# Altium PCB MAGI'sUSBMeter.PcbDoc
Units mil, origin at the board's own origin, x right, y up, seen from the top; angles counter-clockwise.
Board outline 6000 x 4000 mil, 2 copper layers (Top Layer, Bottom Layer); 16 components, 10 nets, 75 pads, 24 vias.
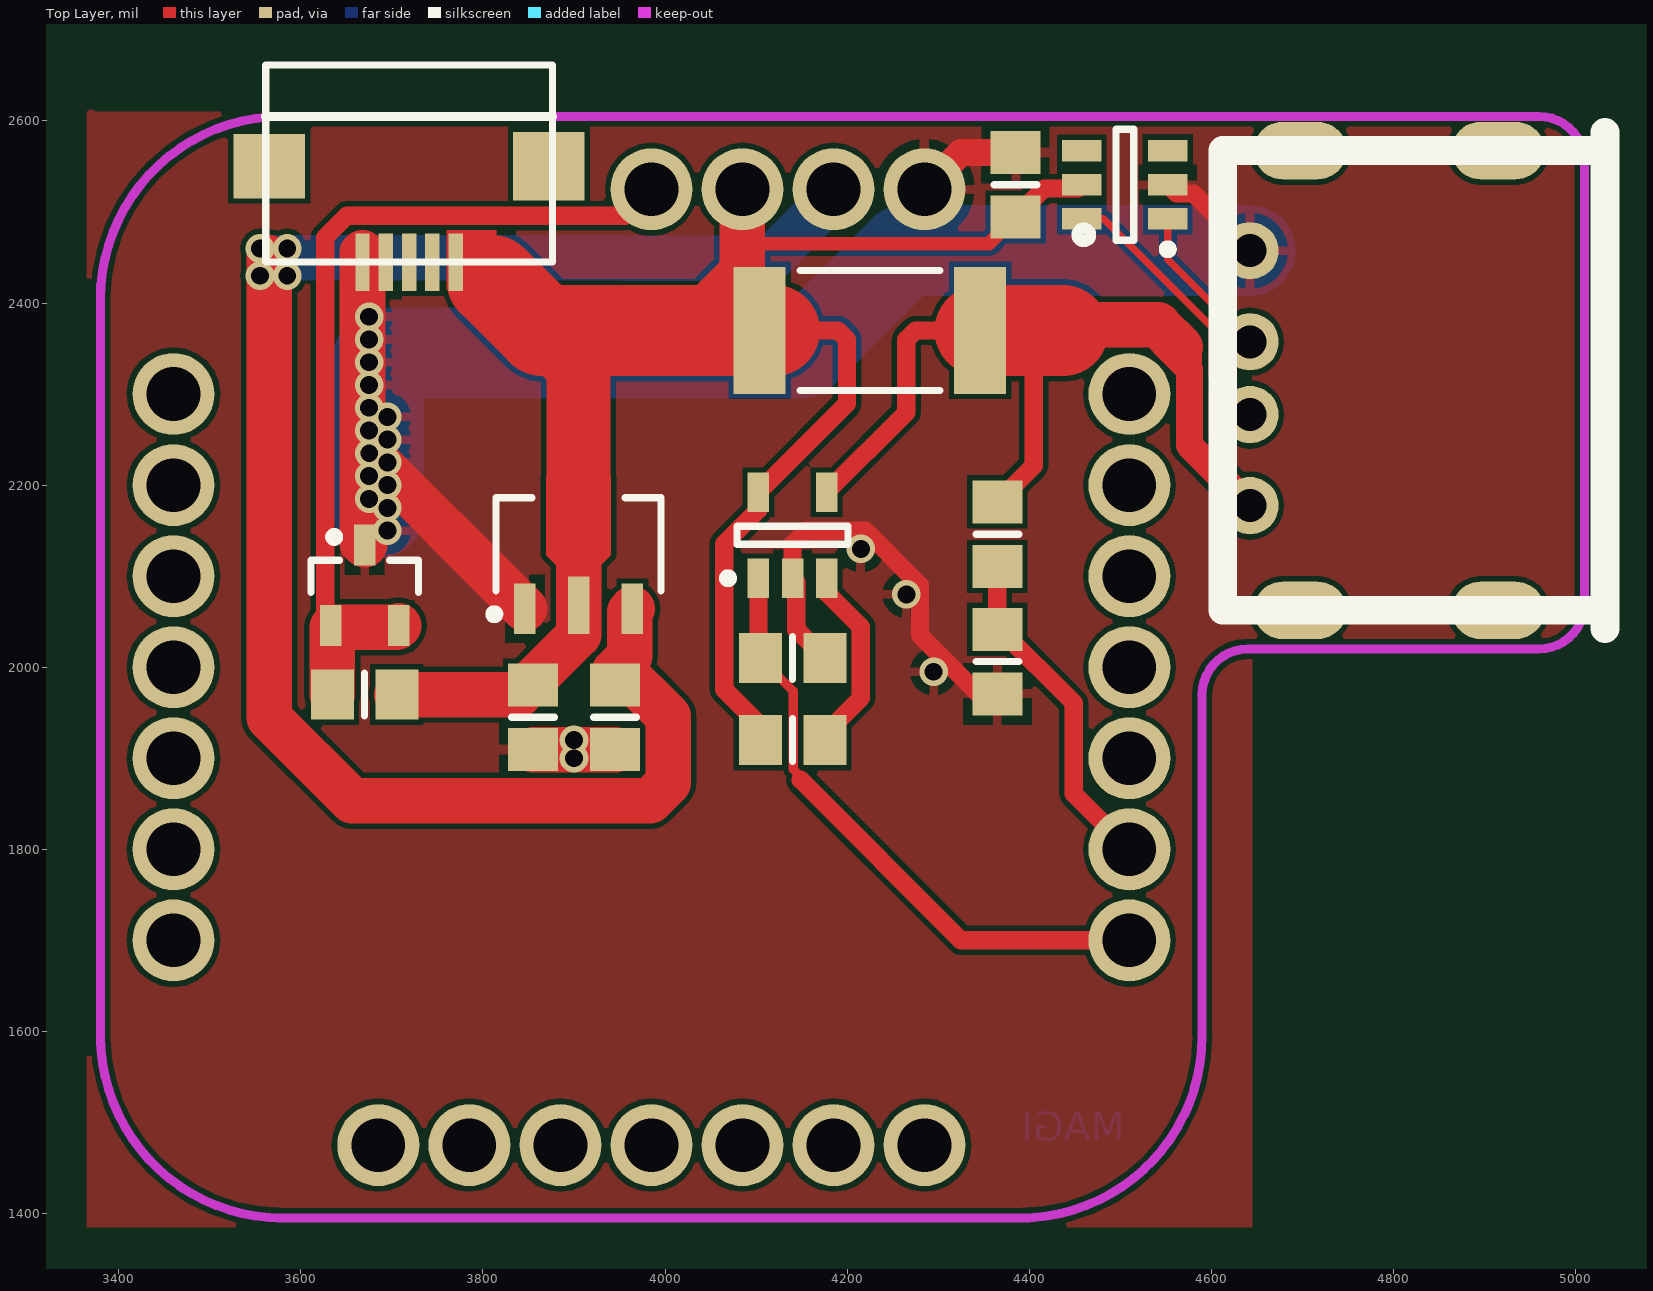
[diagram p0: Top Layer view]
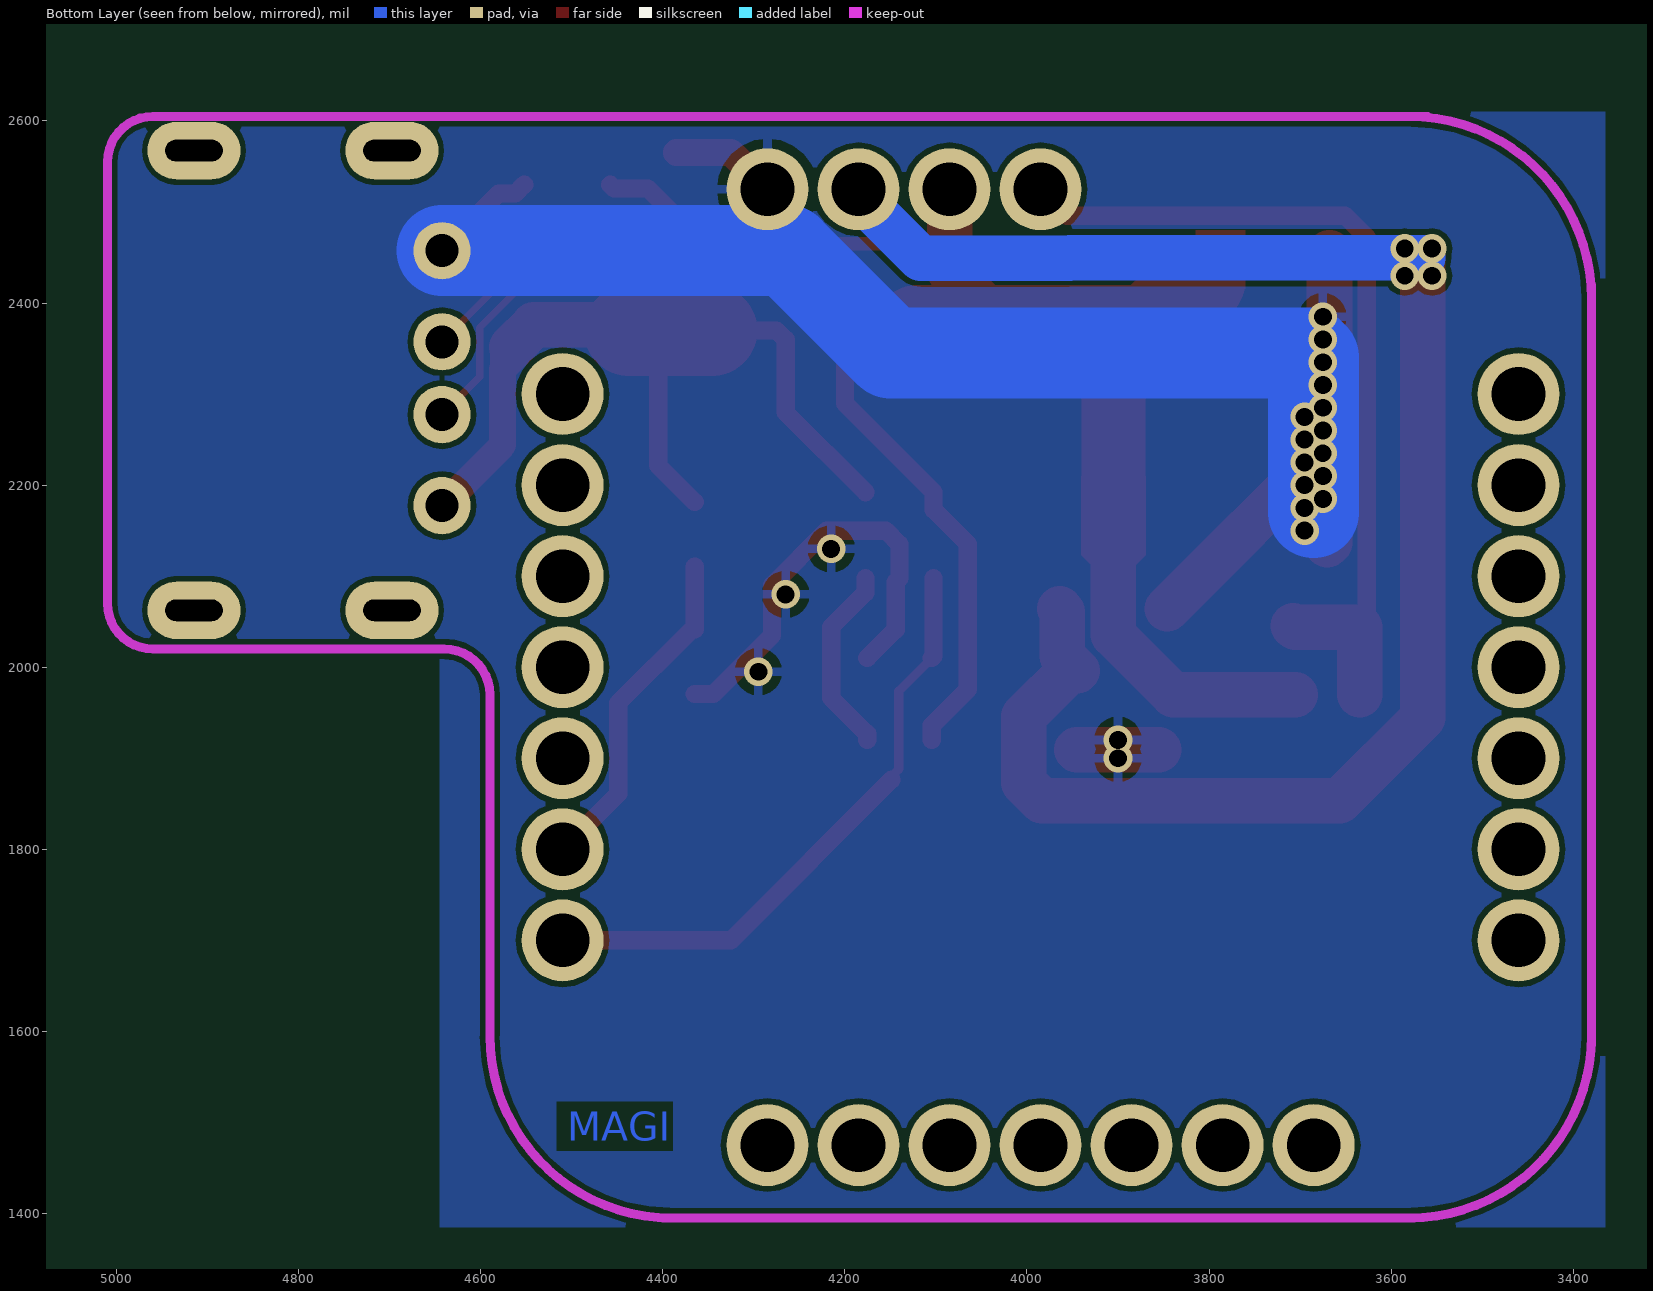
[diagram p1: Bottom Layer view, seen from below]

## Layer stack, top to bottom
Top Solder: solder mask 0.4, Solder Resist, Dk 3.5
Top Layer: signal copper 1.4
Dielectric 1: dielectric 12.6, FR-4, Dk 4.8
Bottom Layer: signal copper 1.4
Bottom Solder: solder mask 0.4, Solder Resist, Dk 3.5

## Board outline
1000,1000 7000,1000 7000,5000 1000,5000

## Design rules (kind name [scope] priority, off if disabled: settings)
Clearance [All] p1: gap=6
PolygonConnect [All] p1: connectstyle=Relief reliefconductorwidth=10 reliefentries=4 polygonreliefangle="90 Angle" airgapwidth=10
RoutingVias [All] p1: holewidth=280 width=500 viastyle="Through Hole" minholewidth=12 minwidth=24 maxholewidth=28 maxwidth=50
SolderMaskExpansion [All] p1: expansion=4
Width [All] p1: maxlimit=100 minlimit=6 preferedwidth=10
29 further rules are at their usual default settings.

## Components (designator, comment, footprint, x,y, rotation, side; value= is the part's Value field where it differs from the comment)
C1 "10uf" 6-0805_N 3855,1945 r270 top
C2 "10uf" 6-0805_N 3945,1945 r270 top
C3 "10uf" 6-0805_N 4385,2530 r90 top
J1 "MAGI-M8" MAGI-M8 3985,2000 r0 top
J2 "USB1" USB-04A 4670,2315 r90 top
R1 "RES1_1" 6-0805_N 3670,1970 r0 top
R2 "RES1_1" 6-0805_N 4365,2146.1 r90 top
R3 "RES1_1" 2512 4225,2370 r0 top
R4 "RES1_1" 6-0805_N 4365,2006.1 r90 top
R5 "RES1_1" 6-0805_N 4140,2010 r180 top
R6 "RES1_1" 6-0805_N 4140,1920 r0 top
U1 "HS7333" HS7333 3905,2135 r90 top
U2 "USB" MicroUSB 3725,2545 r0 top
U3 "TL431" SOT23_N 3670,2090 r90 top
U4 "LT6106" LM2731 4140,2145 r90 top
U5 "TPS2513" TPS2513 4505,2530 r180 top

## Footprints (in the part's own frame and the unit in brackets; to place one, negate y for a bottom-side part, rotate by r counter-clockwise, add the part's x,y. Pads: shape width x height; smd on the part's side, far side on the other; paste and mask are expansions set on the pad)
6-0805_N [mm] "Chip Resistor, Body 2.0x1.2mm, IPC Medium Density"
  rect 1.2x1.4 smd: 1(-0.9,0) 2(0.9,0)
  silkscreen extent 0,-0.6 0,0.6, body extent -1.07,-0.7 1.07,0.7, height 0.7
2512 [mm]
  rect 1.45x3.55 smd: 1(-3.075,0) 2(3.075,0)
  silkscreen extent -1.95,-1.68 1.95,1.68, body extent -3.22,-1.7 3.22,1.7, height 0.65
HS7333 [mm] "SOT89, 3-Leads, Body 4.50x2.50mm, Pitch 1.50mm, Lead Span 4.1mm, IPC Medium Density"
  rect 1.4x0.6 smd: 1(-1.8,1.5) 3(-1.8,-1.5)
  rect 1.6x0.6 smd: 2(-1.7,0)
  Top Layer region: -0.9,0.3 -0.3,0.9 1.9,0.9 2.5,0.3 2.5,-0.3 1.9,-0.9 -0.3,-0.9 -0.9,-0.3
  silkscreen extent -2.07,-2.3 1.3,2.47, body extent -1.3,-2.3 1.3,2.3, height 1.6
LM2731 [mm] "SOT23, 5-Leads, Body 2.90x2.80mm, Pitch 0.95mm, IPC Medium Density"
  rect 1.1x0.6 smd: 1(-1.2,0.95) 2(-1.2,0) 3(-1.2,-0.95) 4(1.2,-0.95) 5(1.2,0.95)
  silkscreen extent -1.32,-1.55 0.25,1.92, body extent -0.87,-1.52 0.87,1.53, height 1.45
MAGI-M8 [mil]
  round 90 hole 59.06: 1(300,525) 2(200,525) 3(100,525) 4(0,525) 8(-525,300) 9(-525,200) 10(-525,100) 11(-525,0) 12(-525,-100) 13(-525,-200) 14(-525,-300) 15(-300,-525) 16(-200,-525) 17(-100,-525) 18(0,-525) 19(100,-525) 20(200,-525) 21(300,-525) 22(525,-300) 23(525,-200) 24(525,-100) 25(525,0) 26(525,100) 27(525,200) 28(525,300)
  Keep-Out Layer lines w10: -605,-415 -605,290 -605,420 ; -605,-405 ccw(c-405,-405) -405,-605 ; -605,405 cw(c-405,405) -405,605 ; -425,605 975,605 ; -410,-605 415,-605 ; 405,-605 ccw(c405,-405) 605,-405
  silkscreen extent 468,468 482,482
MicroUSB [mm]
  rect 0.4x1.6 smd: 1(1.143,-2.54) 2(0.493,-2.54) 3(-0.157,-2.54) 4(-0.807,-2.54) 5(-1.457,-2.54)
  rect 2x1.8 smd: 6(-4.057,0.135)
  rect 2x1.9 smd: 7(3.743,0.135)
  silkscreen extent -4.16,-2.54 3.84,2.96, body extent -4.26,-2.64 3.94,3.06, height 3
SOT23_N [mm] "SOT23, 3-Leads, Body 2.9x1.3mm, Pitch 0.95mm, Lead Span 2.3mm - Reverse Pinning, IPC Medium Density"
  rect 1.15x0.6 smd: 1(1.125,0) 2(-1.125,-0.95) 3(-1.125,0.95)
  silkscreen extent -0.2,-1.5 1.47,1.5, body extent -0.7,-1.5 0.7,1.5, height 1.1
TPS2513 [mm]
  rect 1.1x0.6 smd: 1(-1.2,0.95) 2(-1.2,0) 3(-1.2,-0.95) 4(1.2,-0.95) 5(1.2,0) 6(1.2,0.95)
  silkscreen extent -1.33,-1.55 0.25,1.92, body extent -0.87,-1.52 0.87,1.53, height 1.45
USB-04A [mm]
  oval 1.6x2.6 hole 0.6 slot 1.6 at 90 deg: 0(-6.413,-0.699) 0(-6.413,-6.223) 0(6.413,-0.698) 0(6.414,-6.223)
  round 1.6 hole 0.92: 1(-3.492,0.698) 2(-0.953,0.698) 3(1.079,0.699) 4(3.619,0.699)
  silkscreen extent -6.92,-9.21 6.92,1.46

## Part data
C1 C2 C3: library part "CAPACITOR POL", "Capacitor"

## Via types
v1: diameter 31.5, hole 19.68, Top Layer to Bottom Layer, 24 vias

## Nets (pads, with @x,y where several pads share a name; then routed paths per layer and width w, separated by ;. In a path a pad name is that pad's centre, name@x,y a point inside that pad or via, vN(x,y) a via of type N, cw(c..) or ccw(c..) an arc to the next point about the centre after c; other vN are vias at no path point)
3.3V: C2.1 J1.2 U1.3 | length 1874.4
  Top Layer w50: v1@3565,2450 3565,1944.55 3656.29,1853.25 3983.71,1853.25 4003.56,1873.1 4003.56,1946.03 3953.33,1996.26 3945,1996.26 3961,2012.26 3961,2061.08 U1.3
  Bottom Layer w50: v1@3565,2450 3952.52,2450 3953.52,2449 4116.48,2449 4185,2517.52 J1.2
  other v1: 3555,2430 3585,2430 3555,2460 3585,2460
5V: C1.1 C3.1 J1.3 R1.2 R3.1 R6.1 U1.2 U2.1 U4.5 U5.5 | length 2075.8
  Top Layer w8: C3.1@4380,2489.57 C3.1@4407.12,2489.57
  Top Layer w10: R3.1@4120,2370 4155,2370
  Top Layer w15: 4085,2465 4355.43,2465 4380,2489.57 C3.1
  Top Layer w20: R6.1 4104.57,1936.19 4064.94,1975.81 4064.94,2135.41 4102.6,2173.06 U4.5 4200,2289.65 4200,2360 4190,2370 4155,2370 ; C3.1 4416.24,2525.81 4453.57,2525.81 U5.5
  Top Layer w50: R1.2 3738.96,1970 3806.02,1970 3839.55,1970 3905,2035.45 U1.2 3905,2140 ; 4020,2370 4085,2435 4085,2465 J1.3
  Top Layer w70: 3865,2370 3905,2330 3905,2180
  Top Layer w100: 3810,2425 3865,2370 4020,2370 R3.1 R3.1@4120,2370
CS: J1.22 R5.2 U4.1 | length 673.8
  Top Layer w10: R5.2 4140.81,1973.76 4140.81,1887.88 4150.48,1878.22
  Top Layer w20: U4.1 4102.6,2011.97 R5.2 ; 4148.7,1876.44 4325.14,1700 J1.22
DM1: J2.2 U5.6 | length 305.6
  Top Layer w8: U5.6 4481.54,2492.6 4601,2373.13 4601,2319 J2.2
DP1: J2.3 U5.1 | length 172.5
  Top Layer w8: U5.1 4552.24,2447.76 J2.3
GND: C1.2 C2.2 C3.2 J1.1 J2.4 R4.1 R5.1 U1.1 U2.4 U2.5 U3.1 U4.2 U5.2 | length 2547.9
  Top Layer w20: R5.1 4144.19,2041.24 4144.19,2093.57 U4.2 4140,2135 4155,2150 4220,2150 4280,2090 4280,2035 4344.33,1970.67 R4.1 ; U5.2 4561.83,2520.41 4580.53,2520.41 4642.5,2458.43 J2.4
  Top Layer w30: J1.1 4325.43,2565.43 C3.2
  Top Layer w50: U2.5@3667.64,2455 U2.5 v1@3667.64,2242.44 ; U3.1 3667.64,2136.65 v1@3667.64,2242.44 ; U1.1 v1@3667.64,2242.44 ; C1.2 C2.2
  Bottom Layer w100: v1@3685,2170 v1@3685,2340 ; 3690,2345 4150,2345 4262.5,2457.5 J2.4
  other v1: 3900,1900 3900,1920 4295,1995 4265,2080 4215,2130 3695,2150 3695,2175 3675,2185 3695,2200 3675,2210 3695,2225 3675.08,2235 3695,2250 3675,2260 3695,2275 3675,2285 3675,2310 3675,2335 3675,2360 3675,2385
NetR6_2: R6.2 U4.3 | length 209.8
  Top Layer w20: R6.2 4175.43,1926.82 4215.06,1966.44 4215.06,2044.19 4177.4,2081.84 U4.3
VOUT: J2.1 R2.2 R3.2 U4.4 | length 939.2
  Top Layer w10: 4305,2370 R3.2
  Top Layer w20: U4.4 4265,2279.84 4265,2360 4275,2370 4305,2370 ; R2.2 4405,2221.54 4405,2337.84 4437.16,2370
  Top Layer w30: 4558.93,2344.41 4576,2327.34 4576,2244 J2.1
  Top Layer w50: 4437.16,2376 4541.48,2376 4566,2351.48
  Top Layer w100: R3.2 4437.16,2370
VREF2.5: J1.4 R1.1 U3.2 U3.3 | length 956.5
  Top Layer w20: U3.3 3626.64,2051.67 3626.64,2471.98 3650.66,2496 3956,2496 J1.4
  Top Layer w50: R1.1 3634.57,2043.74 3705.43,2043.74 U3.2
VS: J1.23 R2.1 R4.2 | length 372.5
  Top Layer w20: R2.1 R4.2 4367.94,2041.54 4449,1960.48 4449,1861 J1.23
pads on no net: J1.8 J1.9 J1.10 J1.11 J1.12 J1.13 J1.14 J1.15 J1.16 J1.17 J1.18 J1.19 J1.20 J1.21 J1.24 J1.25 J1.26 J1.27 J1.28 J2.0 U2.2 U2.3 U2.6 U2.7 U5.3 U5.4

## Polygon pours and split planes (outlines as drawn)
GND on Top Layer "Bottom Layer-No Net" (solid, pour order 2): 3375,2610 5015,2610 5015,2015 5015,2010 4645,2010 4645,1385 3365,1385 3365,2615
GND on Bottom Layer "Bottom Layer-No Net" (solid, pour order 4): 3365,2610.24 3365,2610 5020,2610 5020,2010 5020,2008.78 4645,2008.78 4645,1385 3365,1385

## Keep-outs
Keep-Out Layer:
  lines w10: 4590,1595 4590,1970 cw(c4640,1970) 4640,2020 4960,2020 ccw(c4960,2070) 5010,2070 5010,2555 ccw(c4960,2555) 4960,2605 4900,2605

## Other copper
Top Layer:
  rectangle net 5V: 3760,2415 3815,2480
  rectangle net VOUT: 4566,2315 4590,2351.48

## Silkscreen, mask and mechanical layers (free items; w line width, h text height)
Top Solder:
  rectangle: 4566,2315 4590,2351.48
  lines w30: 4558.93,2344.41 4576,2327.34 4576,2244 4642.5,2177.5
  lines w50: 4505,2376 4541.48,2376 4566,2351.48
  text "MAGI" at 3435,1595 h39.37
  text "USBMeter" at 3435,1540 h39.37

## Text inside footprints (layer, text, board x,y; h text height)
J1: Bottom Layer "MAGI" at 4505,1480 h31.5